# Altium PCB PCB1.PcbDoc
Units mil, origin at the board's own origin, x right, y up, seen from the top; angles counter-clockwise.
Board outline 1480 x 1240 mil, 4 copper layers (Top Copper, GND Layer, PWR Layer, Bottom Copper), stack 46.063 mil thick; 32 components, 16 nets, 86 pads, 50 vias.
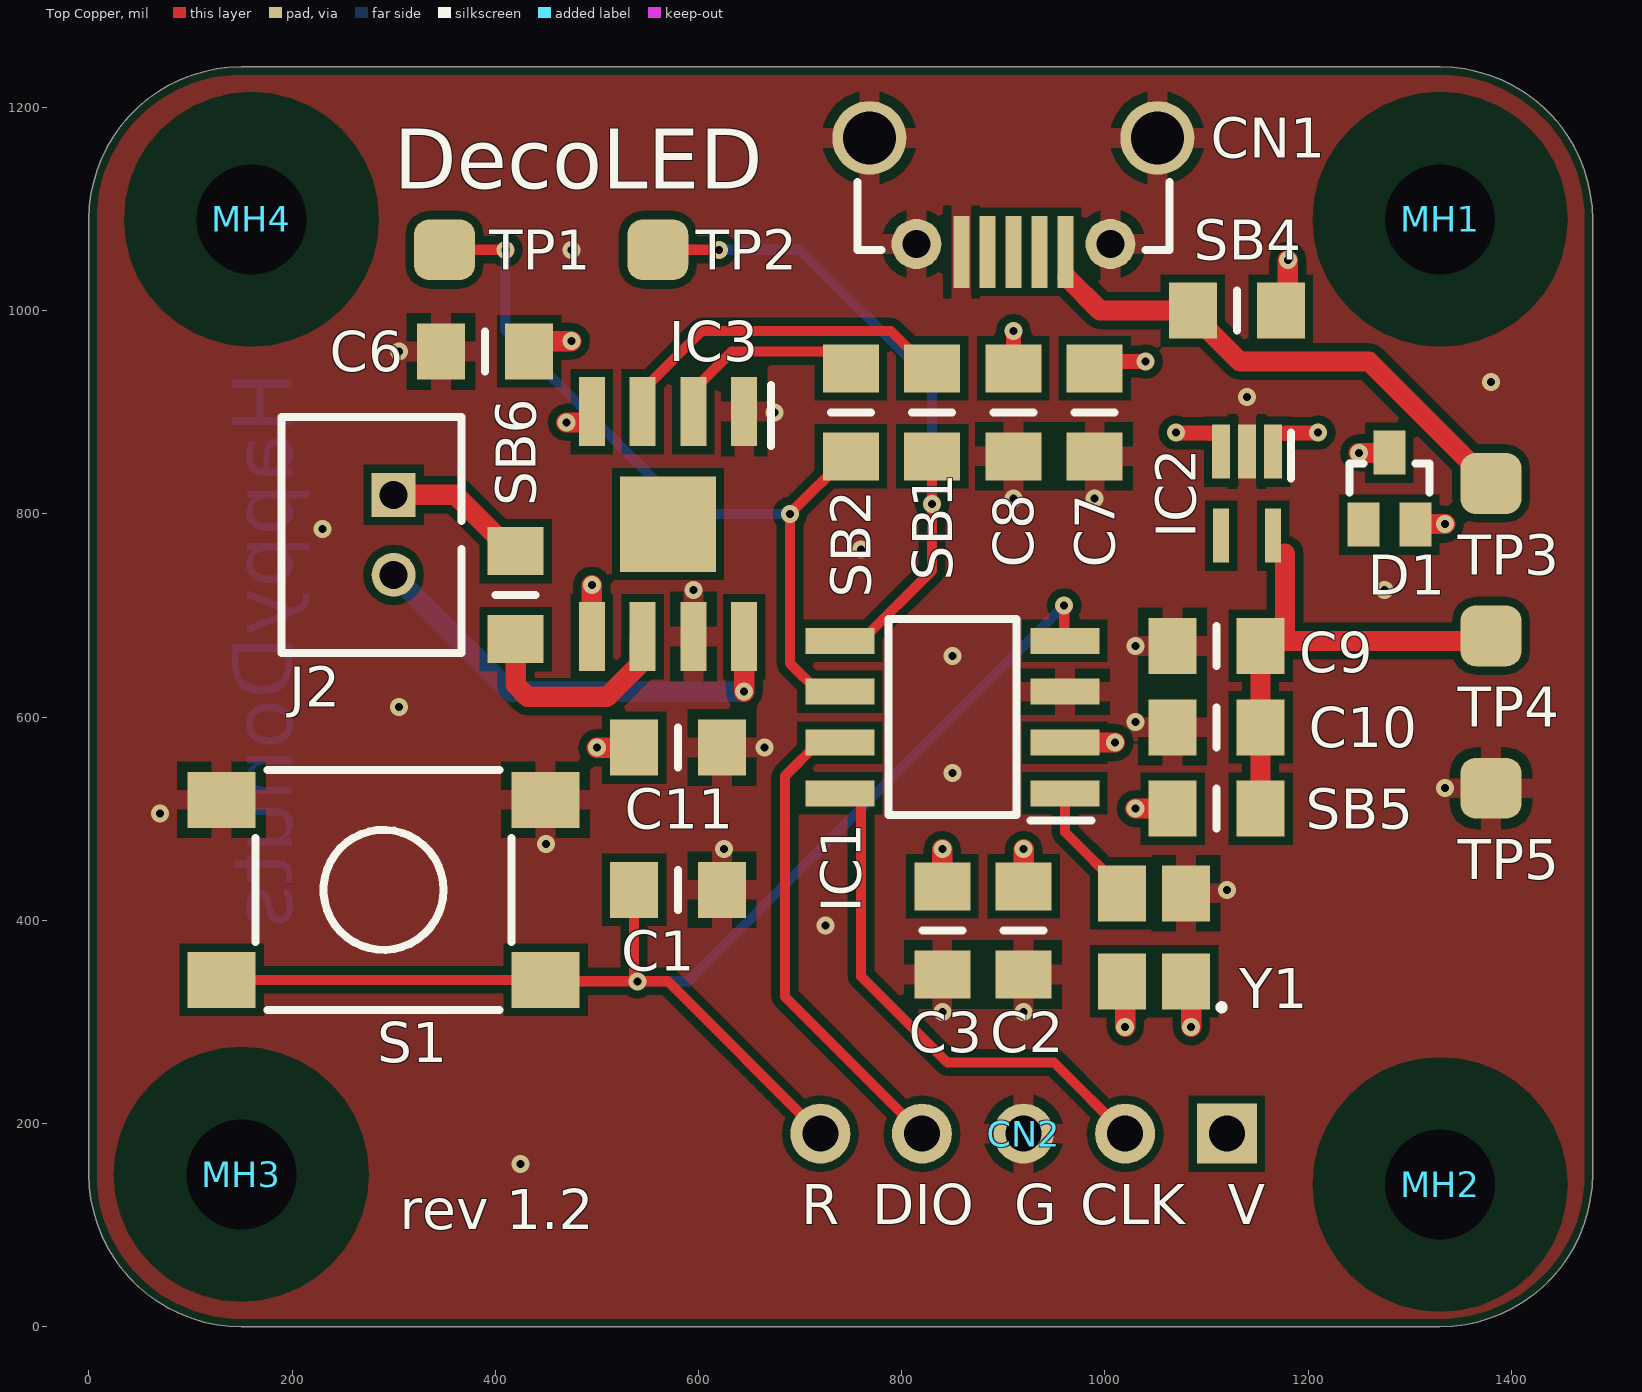
[diagram p0: Top Copper view]
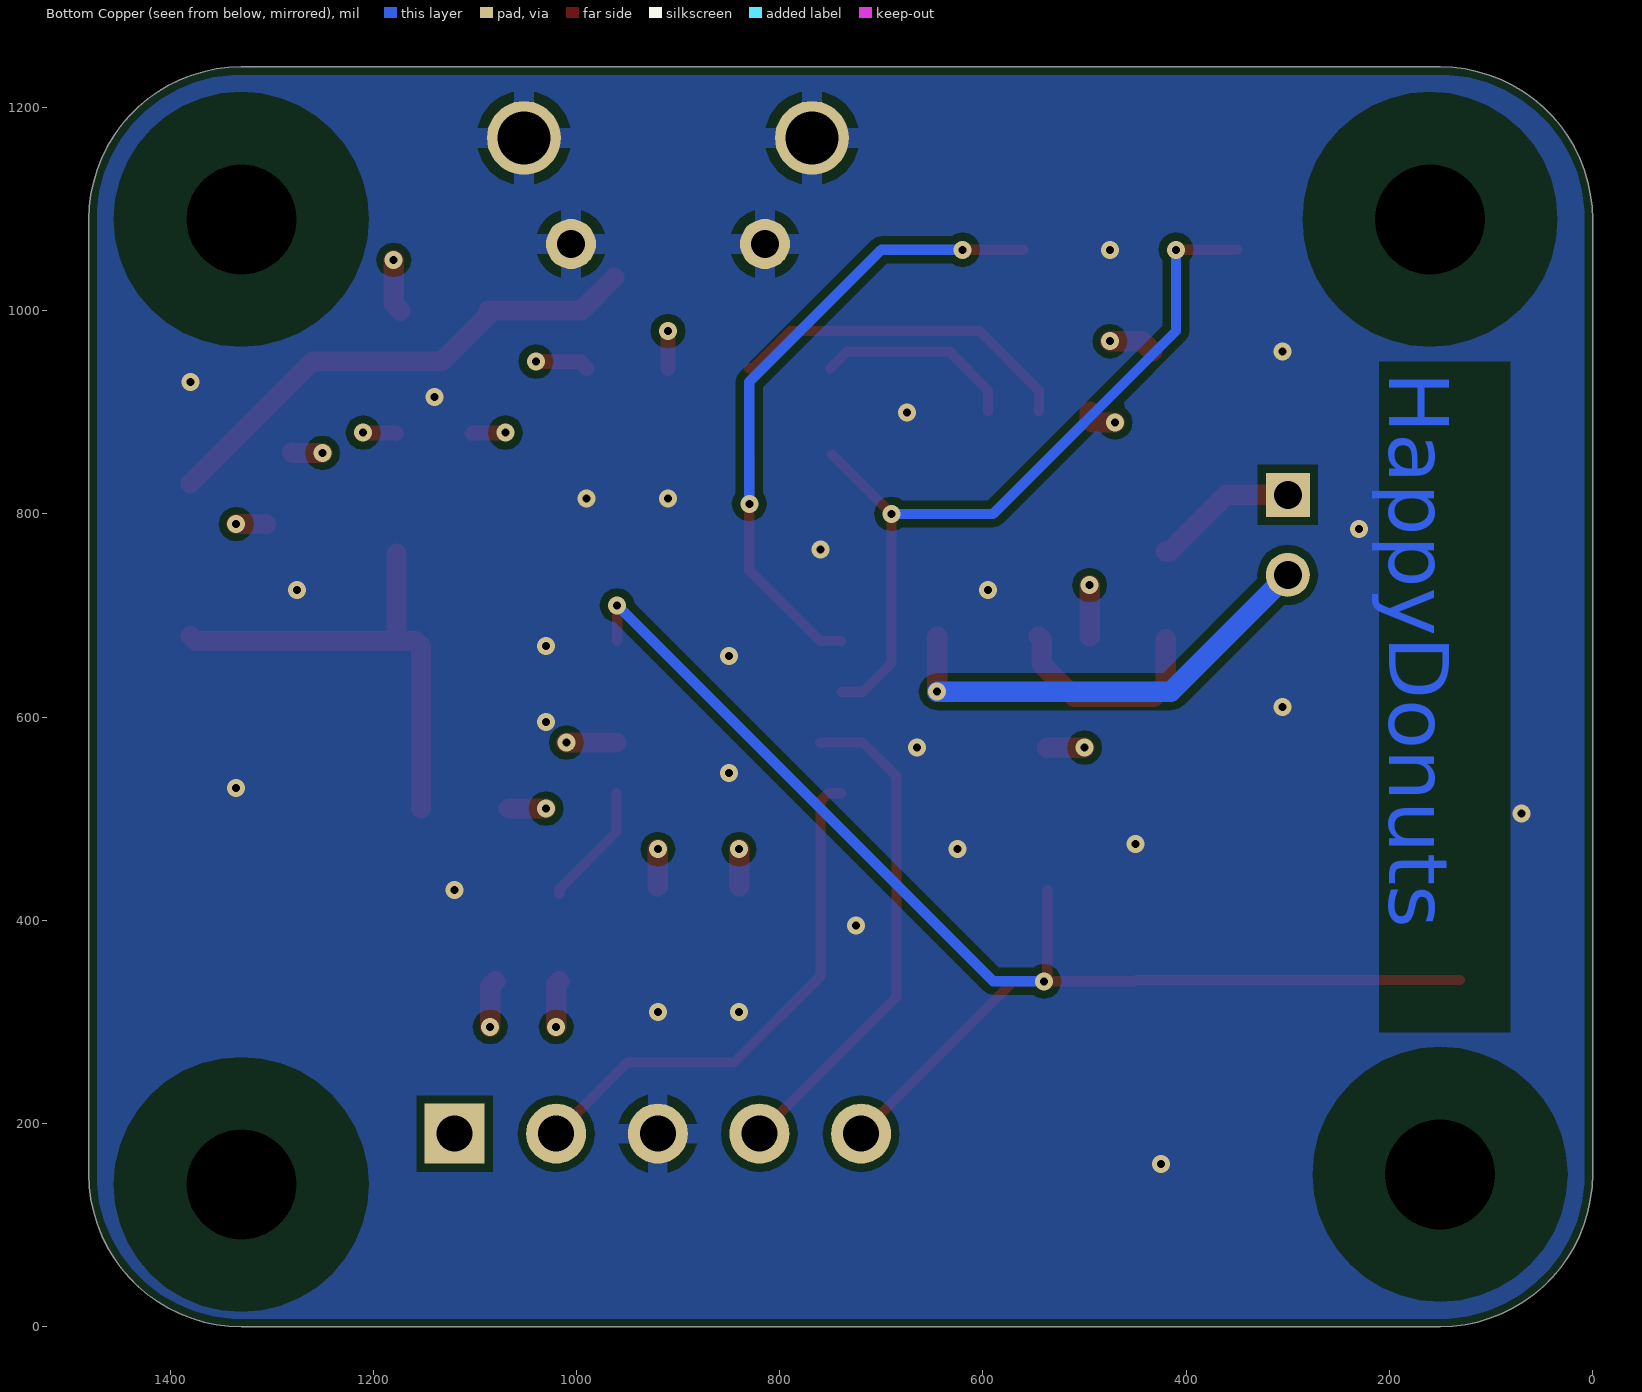
[diagram p1: Bottom Copper view, seen from below]
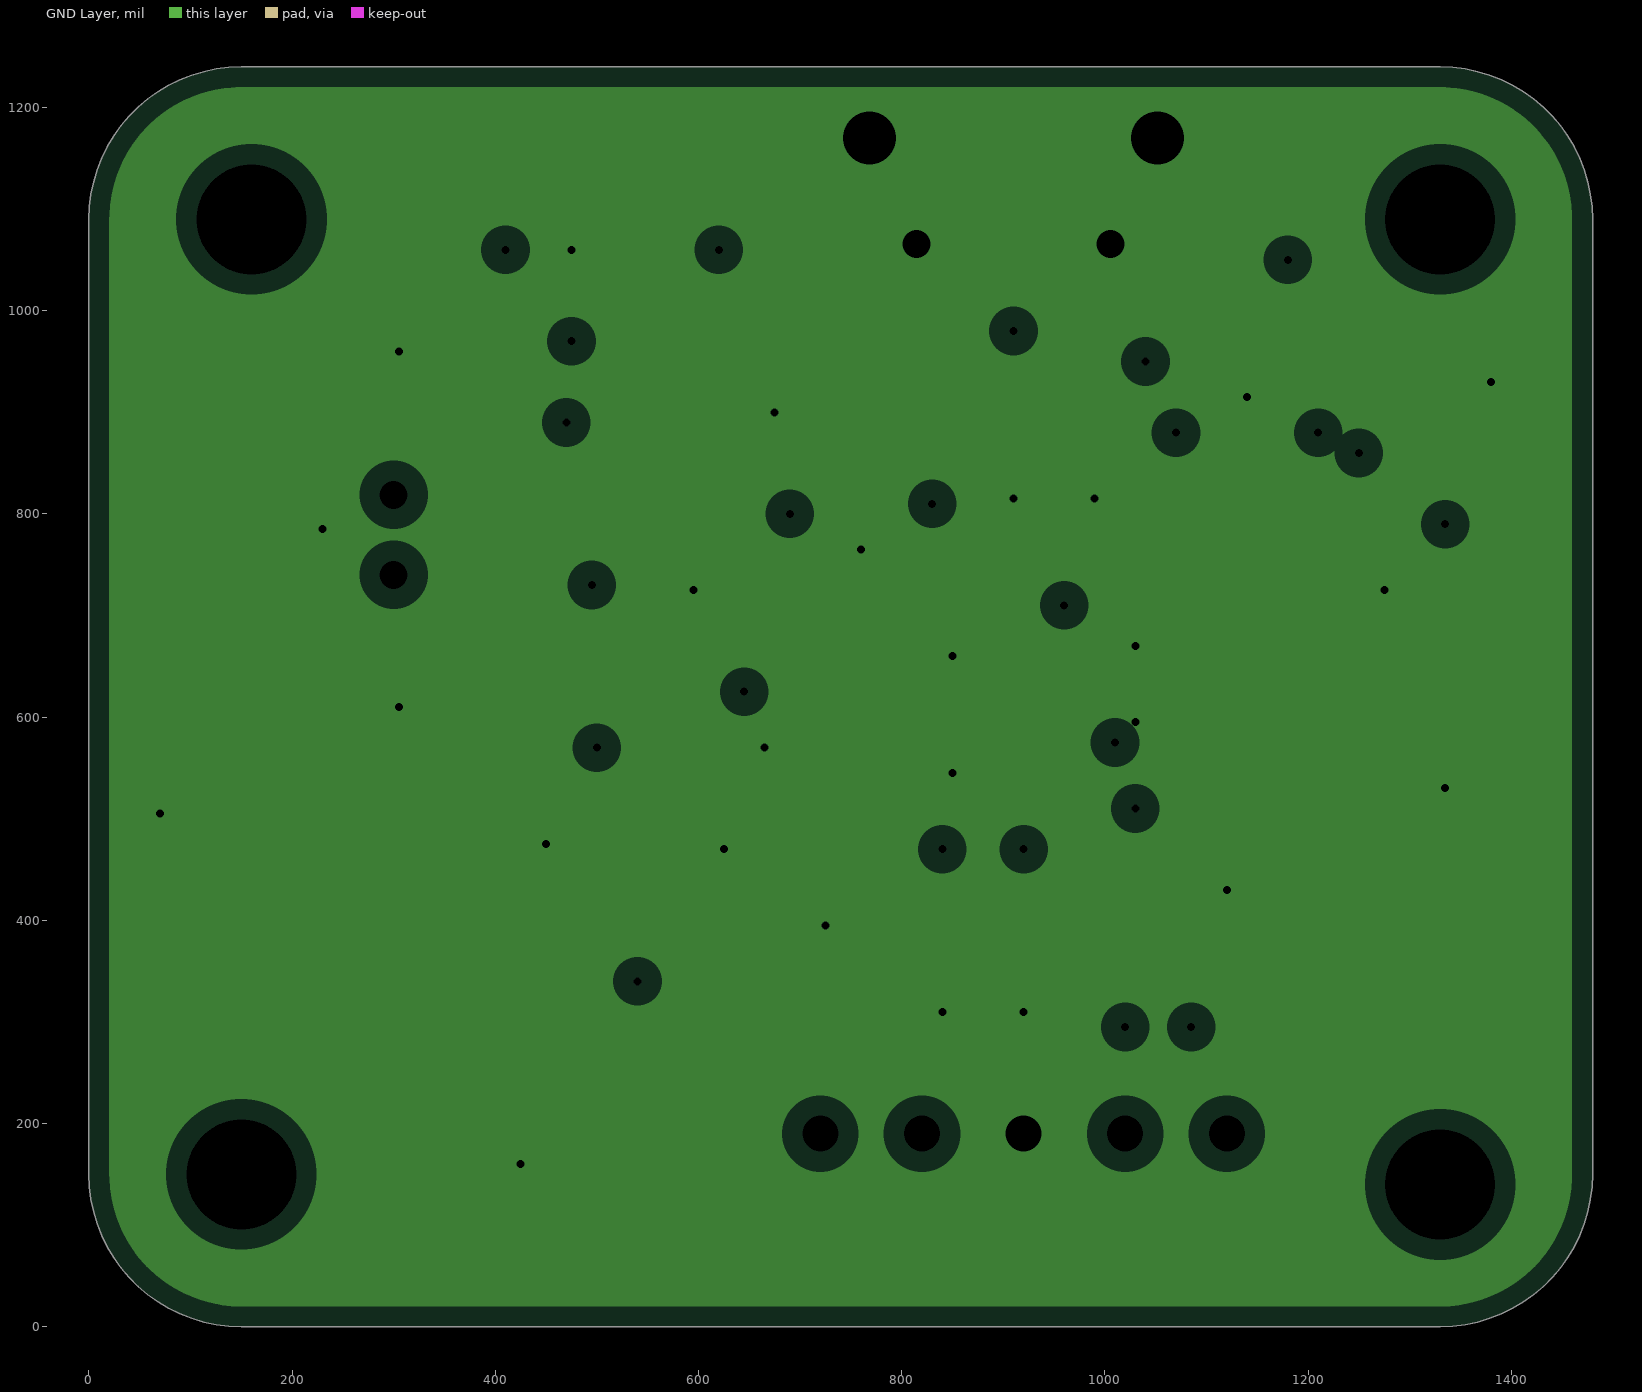
[diagram p2: GND Layer, clearances drawn from the general rule]
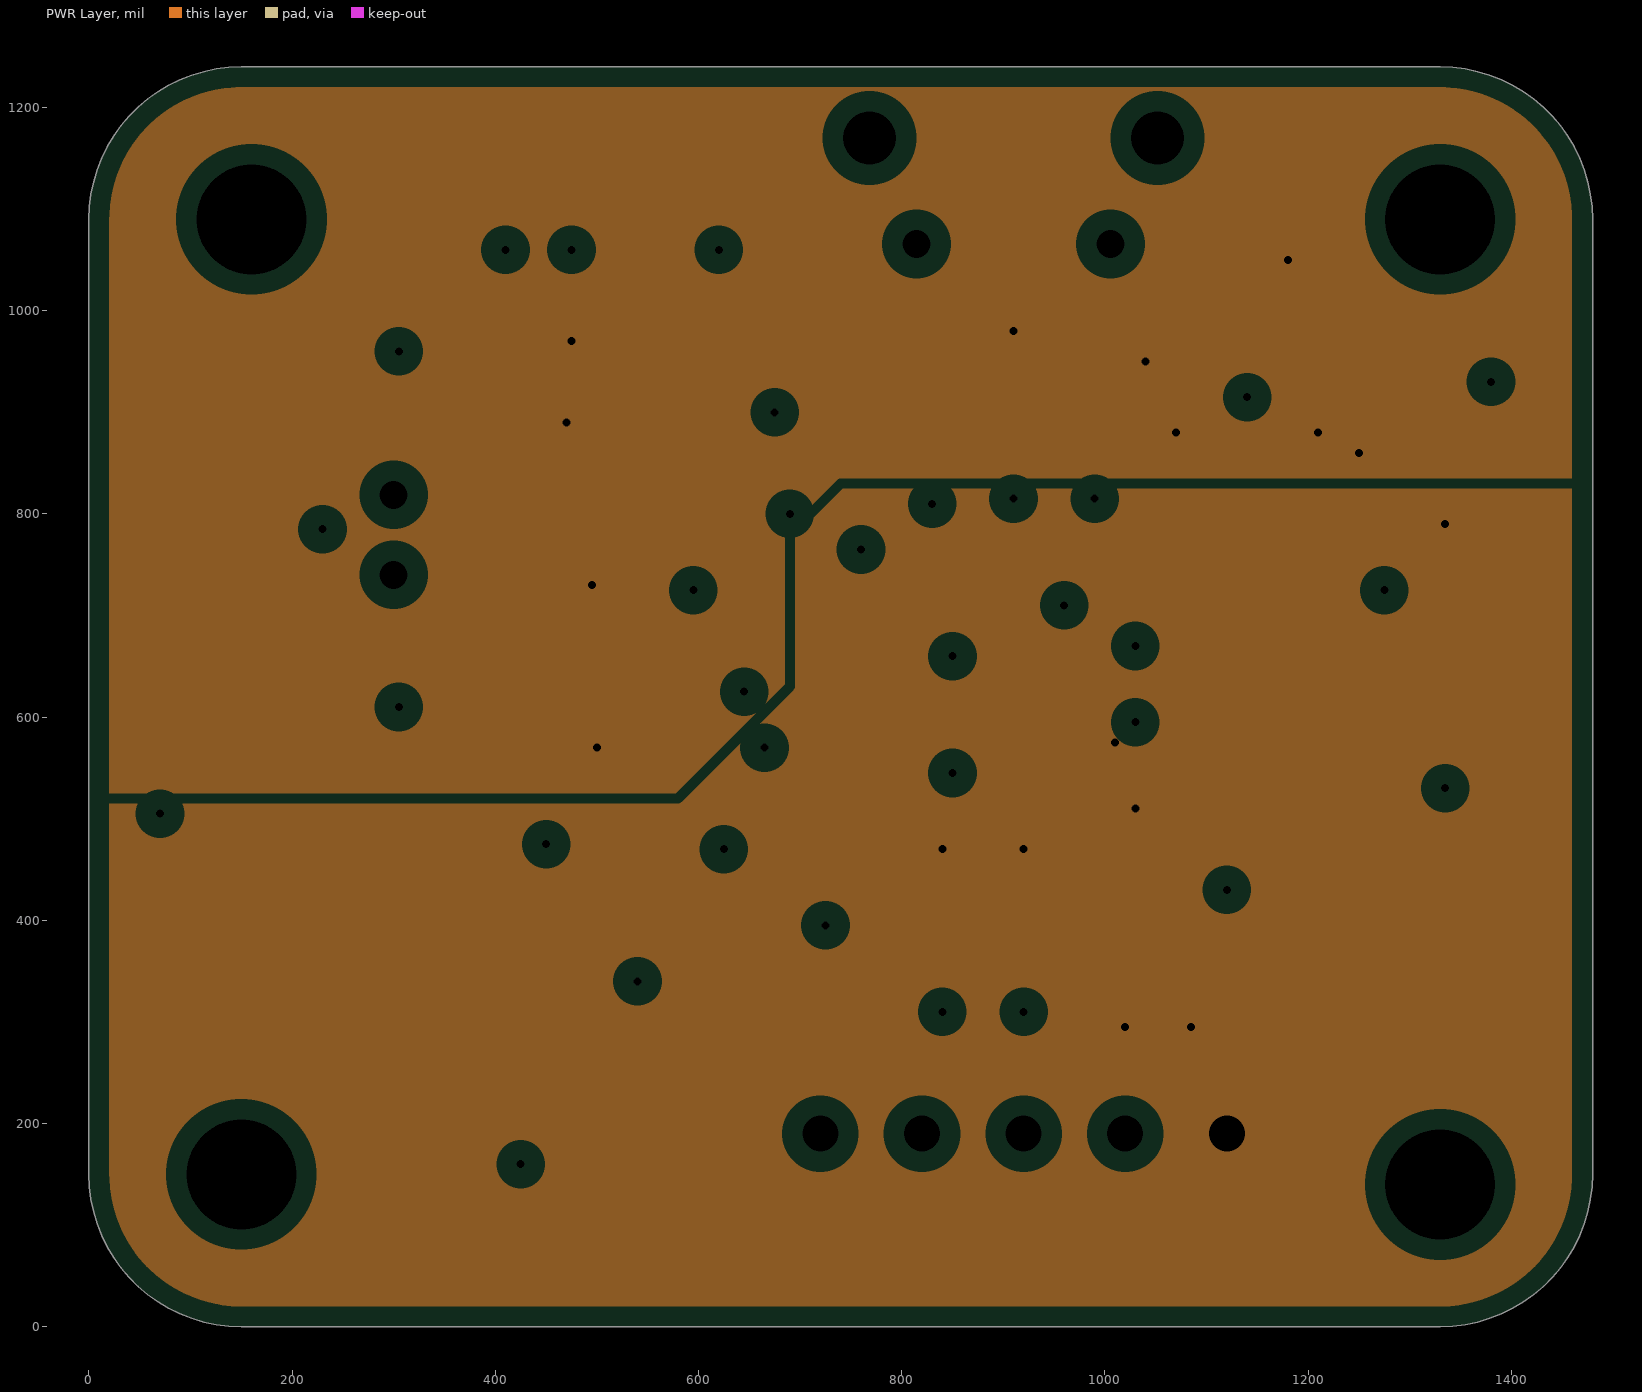
[diagram p3: PWR Layer, clearances drawn from the general rule]
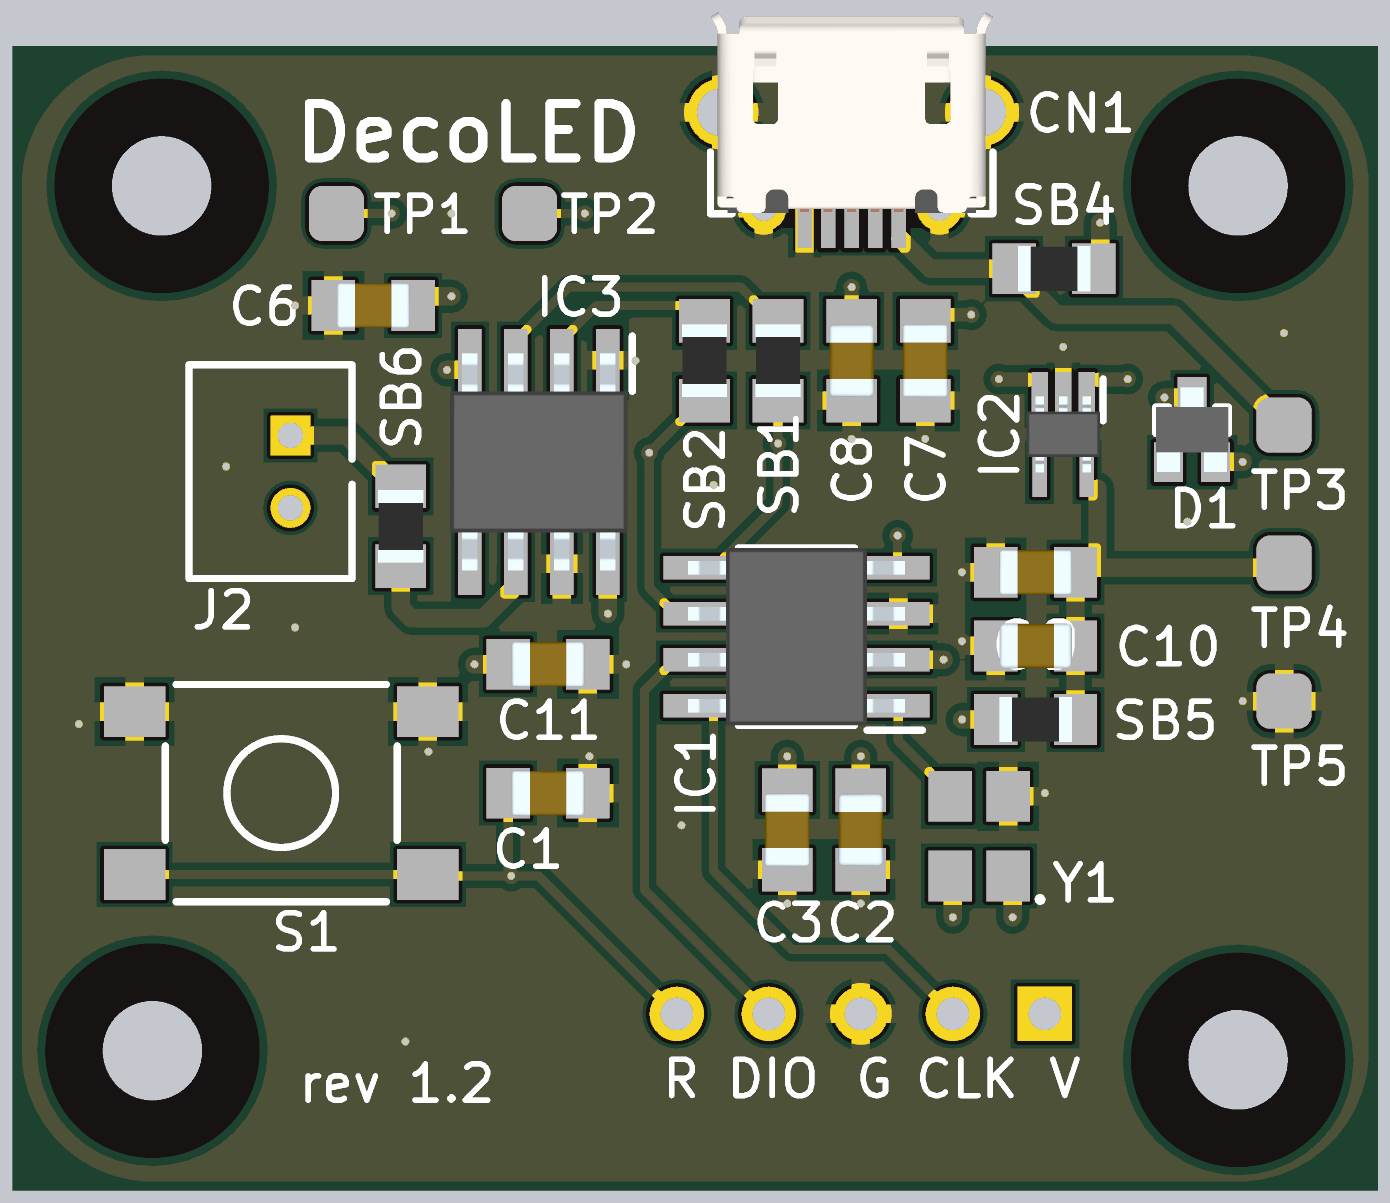
[diagram p4: 3D render of the assembled board from above, using the file's embedded part models]

## Layer stack, top to bottom
Top Mask: solder mask 0.5906, Solder Resist, Dk 3.8
Top Copper: signal copper 1.378
Dielectric 1: prepreg 7.874, 7628, Dk 4.6
GND Layer: plane copper 0.689, net GND
Core: core 26.1811, FR-4, Dk 4.5
PWR Layer: plane copper 0.689, net (Multiple Nets)
Dielectric 2: prepreg 7.874, 7628, Dk 4.6
Bottom Copper: signal copper 1.378
Bottom Mask: solder mask 0.5906, Solder Resist, Dk 3.8

## Board outline
150,0 cw(c150,150) 0,150 0,1090 cw(c150,1090) 150,1240 1330,1240 cw(c1330,1090) 1480,1090 1480,150 cw(c1330,150) 1330,0

## Design rules (kind name [scope] priority, off if disabled: settings)
BoardOutlineClearance [All] p1: gap=7.87 ignorepadtopadclearanceinfootprint=FALSE except(15.75: Arc-SplitBarrior Arc-SplitContinuation Track-SplitBarrior Track-SplitContinuation SMDPad-SplitBarrior SMDPad-SplitContinuation THPad-SplitBarrior THPad-SplitContinuation Via-SplitBarrior Via-SplitContinuation Fill-SplitBarrior Fill-SplitContinuation Poly-SplitBarrior Poly-SplitContinuation Region-SplitBarrior Region-SplitContinuation Text-SplitBarrior Text-SplitContinuation)
Clearance "Mounting Holes" [HasFootprint('MOUNTING_HOLE_NP')] p1: gap=7.87 ignorepadtopadclearanceinfootprint=FALSE except(3.5: Arc-Arc Arc-Track Arc-SMDPad Track-Track Track-SMDPad SMDPad-SMDPad; 5: Arc-Via Track-Via SMDPad-Via THPad-Via Via-Via; 10: Arc-Text Track-Text SMDPad-Text THPad-Text Via-Text Fill-Text Poly-Text Region-Text Text-Text; 70.87: Fill-Hole Poly-Hole Region-Hole)
Clearance "Clearance Bottom Layer" [OnLayer('Bottom Layer')] p2: gap=8 ignorepadtopadclearanceinfootprint=TRUE except(10: Arc-Text Track-Text SMDPad-Text THPad-Text Via-Text Fill-Text Poly-Text Region-Text Text-Text)
Clearance "Clearance Top Layer" [OnLayer('Top Layer')] p3: gap=8 ignorepadtopadclearanceinfootprint=TRUE except(10: Arc-Text Track-Text SMDPad-Text THPad-Text Via-Text Fill-Text Poly-Text Region-Text Text-Text)
Clearance [All] p4: gap=7.87 ignorepadtopadclearanceinfootprint=FALSE except(3.5: Arc-Arc Arc-Track Arc-SMDPad Track-Track Track-SMDPad SMDPad-SMDPad; 5: Arc-Via Track-Via SMDPad-Via THPad-Via Via-Via; 10: Arc-Text Track-Text SMDPad-Text THPad-Text Via-Text Fill-Text Poly-Text Region-Text Text-Text)
HoleSize [All] p1: absolutevalues=TRUE maxlimit=248.03 minlimit=7.87 maxpercent=80.000 minpercent=20.000
MinimumAnnularRing [All] p1: minimumring=3
MinimumSolderMaskSliver [All] p1: minsoldermaskwidth=3.94
PlaneClearance [All] p1: clearance=20
PlaneConnect [All] p1: pad.planeconnectstyle=Relief pad.reliefexpansion=20 pad.reliefentries=4 pad.reliefconductorwidth=10 pad.reliefairgap=10 via.planeconnectstyle=Direct via.reliefexpansion=20 via.reliefentries=4 via.reliefconductorwidth=10 via.reliefairgap=10
PolygonConnect PolygonConnect_1 [All] p1: thpad.connectstyle=Relief thpad.reliefconductorwidth=20 thpad.reliefentries=4 thpad.polygonreliefangle="90 Angle" thpad.airgapwidth=10 smdpad.connectstyle=Relief smdpad.reliefconductorwidth=20 smdpad.reliefentries=4 smdpad.polygonreliefangle="90 Angle" smdpad.airgapwidth=10 via.connectstyle=Direct via.reliefconductorwidth=20 via.reliefentries=4 via.polygonreliefangle="90 Angle" via.airgapwidth=10
RoutingCorners [All] p1: cornerstyle=Round minsetback=100 maxsetback=100
RoutingVias [All] p1: holewidth=19.68 width=39.37 viastyle="Through Hole" minholewidth=7.87 minwidth=17.72 maxholewidth=39.37 maxwidth=78.74
SilkToSilkClearance [All] p1: silktosilkclearance=3.94
SilkToSolderMaskClearance [IsPad] p1: minsilkscreentomaskgap=3.94 clearancetoexposedcopper=TRUE
SolderMaskExpansion [All] p1: expansion=4 istentingtop=FALSE
Width [All] p1: maxlimit=100 minlimit=3.5 preferedwidth=15
23 further rules are at their usual default settings.

## Components (designator, comment, footprint, x,y, rotation, side; value= is the part's Value field where it differs from the comment)
C1 "C0805C104K5RAC7411" CAPC2012X94N 580,430 r180 top value=100nF
C2 "CL21A475KPFNNNE" CAPC2012X135N 920,390 r90 top value=4.7uF
C3 "C0805C104K5RAC7411" CAPC2012X94N 840,390 r90 top value=100nF
C6 "C0805C104K5RAC7411" CAPC2012X94N 390,960 r0 top value=100nF
C7 "C0805C104K5RAC7411" CAPC2012X94N 990,900 r90 top value=100nF
C8 "885012107015" CAPC2012X135N 910,900 r90 top value=1uF
C9 "885012107015" CAPC2012X135N 1110,590 r0 top value=1uF
C10 "C0805C104K5RAC7411" CAPC2012X94N 1110,670 r0 top value=100nF
C11 "C0805C104K5RAC7411" CAPC2012X94N 580,570 r180 top value=100nF
CN1 "920-E52A2021S10100" USB307530A 910,1170 r180 top
CN2 "CN_5PIN" CN_5PIN 1120,190 r180 top
D1 "RB715UMTL" DAN217UMTL 1280,825 r0 top
IC1 "STM32G031J6M6" SOIC127P600X175-8N 850,600 r180 top
IC2 "MIC5366-3.3YC5-TR" SOT65P210X110-5N 1140,820 r270 top value=3.3V/150mA
IC3 "TB67H450FNG,EL" SOIC127P600X175-9N 570,790 r270 top
J2 "B2B-PH-K-S_LF__SN_" SHDR2W50P0X200_1X2_590X450X600P 300,818.74 r90 top
MH1 "MOUNTING_HOLE_NP" MOUNTING_HOLE_NP 1330,1090 r0 top
MH2 "MOUNTING_HOLE_NP" MOUNTING_HOLE_NP 1330,140 r0 top
MH3 "MOUNTING_HOLE_NP" MOUNTING_HOLE_NP 150,150 r0 top
MH4 "MOUNTING_HOLE_NP" MOUNTING_HOLE_NP 160,1090 r0 top
S1 "PTS815_SJM_250_SMTR_LFS" EVP-BT3G4A000 290,430 r0 top
SB1 "RC0805FR-070RL" RESC2012X60N 830,900 r270 top
SB2 "RC0805FR-070RL" RESC2012X60N 750,900 r270 top
SB4 "RC0805FR-070RL" RESC2012X60N 1130,1000 r0 top
SB5 "RC0805FR-070RL" RESC2012X60N 1110,510 r180 top
SB6 "RC0805FR-070RL" RESC2012X60N 420,720 r90 top
TP1 "TEST_POINT" TEST_POINT 350,1060 r0 top
TP2 "TEST_POINT" TEST_POINT 560,1060 r90 top
TP3 "TEST_POINT" TEST_POINT 1380,830 r0 top
TP4 "TEST_POINT" TEST_POINT 1380,680 r0 top
TP5 "TEST_POINT" TEST_POINT 1380,530 r0 top
Y1 "ASEKDV-32.768kHz-LC-T" ASEKDV-32.768kHz-LC-T 1048.5,383.31 r90 top value=32.768kHz

## Footprints (in the part's own frame and the unit in brackets; to place one, negate y for a bottom-side part, rotate by r counter-clockwise, add the part's x,y. Pads: shape width x height; smd on the part's side, far side on the other; paste and mask are expansions set on the pad)
ASEKDV-32.768kHz-LC-T [mm]
  rect 1.4x1.2 smd: 1(-1.1,-0.8) 2(1.1,-0.8) 3(1.1,0.8) 4(-1.1,0.8)
  silkscreen extent -1.8,-1.73 -1.7,-1.64, body extent -1.6,-1.25 1.6,1.25, height 1.2
CAPC2012X94N [mm]
  rect 1.2x1.4 smd: 1(-1.1,0) 2(1.1,0)
  silkscreen extent 0,-0.5 0,0.5, body extent -1,-0.63 1,0.63, height 0.94
CAPC2012X135N [mm]
  rect 1.2x1.4 smd: 1(-1.1,0) 2(1.1,0)
  silkscreen extent 0,-0.5 0,0.5, body extent -1,-0.63 1,0.63, height 1.35
CN_5PIN [mm] "Connector; Edge; 22 Position"
  rect 1.5x1.5 hole 0.9: 1(0,0)
  round 1.5 hole 0.9: 2(2.54,0) 3(5.08,0) 4(7.62,0) 5(10.16,0)
  body extent -1.17,-1.25 11.53,1.25, height 8.2
DAN217UMTL [mm]
  rect 0.8x1.1 smd: 1(-0.65,-0.9) 2(0.65,-0.9) 3(0,0.9)
  silkscreen extent -1,-0.1 1,0.63, body extent -1,-1.17 1,1.17, height 1.1
EVP-BT3G4A000 [mm]
  rect 1.7x1.4 smd: 1(-4.05,2.25) 2(4.05,2.25) 3(4.05,-2.25) 4(-4.05,-2.25)
  silkscreen extent -3.2,-3 3.2,3, body extent -3.2,-3 3.2,3, height 4.3
MOUNTING_HOLE_NP [mil]
  round 60 hole 108.27 unplated mask+86.61: 5(0,0)
RESC2012X60N [mm]
  rect 1.2x1.4 smd: 1(-1.1,0) 2(1.1,0)
  silkscreen extent 0,-0.5 0,0.5, body extent -1,-0.63 1,0.63, height 0.6
SHDR2W50P0X200_1X2_590X450X600P [mm]
  rect 1.1x1.1 hole 0.7: 1(0,0)
  round 1.1 hole 0.7: 2(-2,0)
  silkscreen extent -3.95,-1.7 1.95,2.8, body extent -3.95,-1.7 1.95,2.8, height 6
SOIC127P600X175-8N [mm]
  rect 1.725x0.65 smd: 1(-2.812,1.905) 2(-2.812,0.635) 3(-2.812,-0.635) 4(-2.812,-1.905) 5(2.812,-1.905) 6(2.812,-0.635) 7(2.812,0.635) 8(2.812,1.905)
  silkscreen extent -3.47,-2.45 1.6,2.58, body extent -3,-2.45 3,2.45, height 1.75
SOIC127P600X175-9N [mm]
  rect 1.725x0.65 smd: 1(-2.812,1.905) 2(-2.812,0.635) 3(-2.812,-0.635) 4(-2.812,-1.905) 5(2.812,-1.905) 6(2.812,-0.635) 7(2.812,0.635) 8(2.812,1.905)
  rect 2.39x2.39 smd: 9(0,0)
  silkscreen extent -3.47,2.58 -1.95,2.58, body extent -3,-2.45 3,2.45, height 1.75
SOT65P210X110-5N [mm]
  rect 1.35x0.45 smd: 1(-1.05,0.65) 2(-1.05,0) 3(-1.05,-0.65)
  rect 1.35x0.4 smd: 4(1.05,-0.65) 5(1.05,0.65)
  silkscreen extent -1.53,1.1 -0.38,1.1, body extent -1.05,-1.01 1.05,1.01, height 1.1
TEST_POINT [mil] "Test point"
  rrect50% 60x60 smd: TP(0,0)
USB307530A [mm]
  rect 0.4x1.8 smd mask+0.125: 1(-1.3,2.85) 2(-0.65,2.85) 3(0,2.85) 4(0.65,2.85) 5(1.3,2.85)
  round 1.25 hole 0.7 mask+0.102: 6(2.425,2.65)
  round 1.85 hole 1.328: 7(3.6,0) 8(-3.6,0)
  round 1.25 hole 0.7: 9(-2.425,2.65)
  silkscreen extent -3.9,1.1 3.9,2.8, body extent -3.9,-2.77 3.9,2.77, height 2.49

## Part data
C1 C3 C6 C7 C10 C11: "Capacitor", Manufacturer_Name=Kemet, Mouser Part Number=80-C0805C104K5RACLR, Arrow Part Number=C0805C104K5RAC7411, Arrow Price/Stock=https://www.arrow.com/en/products/c0805c104k5rac7411/kemet-corporation, Datasheet Link=https://www.mouser.com/datasheet/2/212/KEM_C1002_X7R_SMD-1102033.pdf, Height=0.88mm, Manufacturer_Part_Number=C0805C104K5RAC7411, Mouser Price/Stock=https://www.mouser.co.uk/ProductDetail/KEMET/C0805C104K5RAC7411?qs=jbRM9o5BbzPcVXF0wW9AYg%3D%3D
C2: "Capacitor", Manufacturer_Name="Wurth Elektronik", Mouser Part Number=187-CL21A475KPFNNNE, Datasheet Link=https://www.mouser.fr/datasheet/2/585/MLCC-1837944.pdf, Height=1.35mm, Manufacturer_Part_Number=CL21A475KPFNNNE, Mouser Price/Stock=https://www.mouser.co.uk/ProductDetail/Wurth-Elektronik/885012107015?qs=0KOYDY2FL2%252BNQREZP%252BtVoQ%3D%3D
C8 C9: "Capacitor", Manufacturer_Name="Wurth Elektronik", Mouser Part Number=710-885012107015, Datasheet Link=https://katalog.we-online.com/pbs/datasheet/885012107015.pdf, Height=1.35mm, Manufacturer_Part_Number=885012107015, Mouser Price/Stock=https://www.mouser.co.uk/ProductDetail/Wurth-Elektronik/885012107015?qs=0KOYDY2FL2%252BNQREZP%252BtVoQ%3D%3D
CN1: "USB connector", Arrow Part Number=TB67H450FNG,EL, Manufacturer_Name="Jing Extension of the Electronic Co.", Arrow Price/Stock=https://www.arrow.com/en/products/tb67h450fngel/toshiba?region=nac, Datasheet Link=http://toshiba.semicon-storage.com/info/docget.jsp?did=65346&prodName=TB67H450FNG, Height=1.9mm, Manufacturer_Part_Number=https://datasheet.lcsc.com/lcsc/2103051832_Jing-Extension-of-the-Electronic-Co--920-E52A2021S10100_C10418.pdf, Mouser Part Number=920-E52A2021S10100, Mouser Price/Stock=https://www.mouser.co.uk/ProductDetail/Toshiba/TB67H450FNGEL?qs=h6V4JsTaLXeReNg2bp0jug%3D%3D
CN2: "Connector"
D1: "Schottky Diode", Manufacturer_Name="ROHM Semiconductor", Mouser Part Number=755-RB715UMTL, Datasheet Link=http://uk.rs-online.com/web/p/products/1835297, Height=1mm, Manufacturer_Part_Number=RB715UMTL, Mouser Price/Stock=https://www.mouser.co.uk/ProductDetail/ROHM-Semiconductor/RB715UMTL?qs=HXFqYaX1Q2wTXMfu8QxCQg%3D%3D
IC1: "Integrated Circuit", Manufacturer_Name=STMicroelectronics, Mouser Part Number=511-STM32G031J6M6, Datasheet Link=https://www.mouser.fr/datasheet/2/389/dm00613879-1799607.pdf, Height=1.75mm, Manufacturer_Part_Number=STM32G031J6M6
IC2: "LDO", Arrow Part Number=MIC5365-3.3YC5-TR, Manufacturer_Name=Microchip, Mouser Part Number=998-MIC5366-3.3YC5TR, Arrow Price/Stock=https://www.arrow.com/en/products/mic5365-3.3yc5-tr/microchip-technology?region=nac, Datasheet Link=https://www.mouser.fr/datasheet/2/268/MIC5365_6_High_Performance_Single_150mA_LDO_DS2000-2826882.pdf, Height=1.1mm, Manufacturer_Part_Number=MIC5366-3.3YC5-TR, Mouser Price/Stock=https://www.mouser.co.uk/ProductDetail/Microchip-Technology-Micrel/MIC5365-33YC5-TR?qs=U6T8BxXiZAXvJj%252BPZ%252B301w%3D%3D
IC3: "Integrated Circuit", Manufacturer_Name=Toshiba, Mouser Part Number=757-TB67H450FNGEL, Arrow Part Number=TB67H450FNG,EL, Arrow Price/Stock=https://www.arrow.com/en/products/tb67h450fngel/toshiba?region=nac, Datasheet Link=http://toshiba.semicon-storage.com/info/docget.jsp?did=65346&prodName=TB67H450FNG, Height=1.75mm, Manufacturer_Part_Number=TB67H450FNG,EL, Mouser Price/Stock=https://www.mouser.co.uk/ProductDetail/Toshiba/TB67H450FNGEL?qs=h6V4JsTaLXeReNg2bp0jug%3D%3D
J2: "Connector", Arrow Part Number=B2B-PH-K-S(LF)(SN), Manufacturer_Name="JST (JAPAN SOLDERLESS TERMINALS)", Arrow Price/Stock=https://www.arrow.com/en/products/b2b-ph-k-s-lf-sn/jst-manufacturing, Datasheet Link=https://datasheet.lcsc.com/szlcsc/JST-Sales-America-B2B-PH-K-S-LF-SN_C131337.pdf, Height=6mm, Manufacturer_Part_Number=B2B-PH-K-S(LF)(SN)
MH1 MH2 MH3 MH4: "Mounting hole"
S1: "Switch", Arrow Part Number="PTS815 SJM 250 SMTR LFS", Manufacturer_Name="C & K COMPONENTS", Mouser Part Number=611-PTS815SJM250SMTR, Arrow Price/Stock=https://www.arrow.com/en/products/pts815-sjm-250-smtr-lfs/ck, Datasheet Link="https://componentsearchengine.com/Datasheets/1/PTS815 SJM 250 SMTR LFS.pdf", Height=2.7mm, Manufacturer_Part_Number="PTS815 SJM 250 SMTR LFS", Mouser Price/Stock=https://www.mouser.co.uk/ProductDetail/CK/PTS815-SJM-250-SMTR-LFS?qs=ahcBuItHZ3xKWmfV%2F2E6bA%3D%3D
SB1 SB2 SB4 SB5 SB6: "Jumper (0 ohm)", Manufacturer_Name="YAGEO (PHYCOMP)", Mouser Part Number=603-RC0805FR-070RL, Datasheet Link=https://datasheet.datasheetarchive.com/originals/distributors/Datasheets_SAMA/902f9e387b938f871d31120f5fc1d65e.pdf, Height=0.6mm, Manufacturer_Part_Number=RC0805FR-070RL, Mouser Price/Stock=https://www.mouser.co.uk/ProductDetail/YAGEO/RC0805FR-070RL?qs=fRxXYNj8ftF6kXqh1XbZJQ%3D%3D
TP1 TP2 TP3 TP4 TP5: "Test point"
Y1: "Crystal or Oscillator", Manufacturer_Name=ABRACON, Mouser Part Number=815-ASEKDV32768KHLCT, Datasheet Link=https://www.mouser.fr/datasheet/2/3/ABRC_S_A0012625913_1-2519507.pdf, Height=1.2mm, Manufacturer_Part_Number=ASEKDV-32.768kHz-LC-T

## Via types
v1: diameter 17.72, hole 7.87, Top Copper to Bottom Copper, tented both sides, 50 vias

## Nets (pads, with @x,y where several pads share a name; then routed paths per layer and width w, separated by ;. In a path a pad name is that pad's centre, name@x,y a point inside that pad or via, vN(x,y) a via of type N, cw(c..) or ccw(c..) an arc to the next point about the centre after c; other vN are vias at no path point)
5V: C6.2 C7.2 C8.2 C11.2 D1.3 IC2.1 IC2.3 IC3.4 IC3.5 SB4.2 | length 405.7
  Top Copper w15: C8.2 v1(910,980) ; C7.2 996.69,950 v1(1040,950) ; v1(1070,880) 1070.47,879.53 1102.13,879.53 1102.6,879.06 ; 1177.4,879.06 1177.87,879.53 1209.53,879.53 v1(1210,880)
  Top Copper w20: C6.2 443.31,970 v1(475,970) ; v1(470,890) 492.2,890 495,892.8 IC3.4 ; IC3.5 v1(495,730) ; v1(500,570) C11.2 ; SB4.2 1180,1006.69 v1(1180,1050) ; v1(1250,860) 1279.57,860 D1.3
GND: C1.1 C2.1 C3.1 C6.1 C7.1 C8.1 C9.1 C10.1 C11.1 CN1.5 CN1.6 CN1.7 CN1.8 CN1.9 CN2.3 IC1.3 IC2.2 IC3.1 IC3.7 S1.1 S1.2 TP5.TP Y1.2 | length 0.9
  Top Copper w19.68: CN1.6 CN1.6@815.2,1065
  other v1: 425,160 840,310 920,310 725,395 1120,430 625,470 450,475 70,505 1335,530 850,545 665,570 1030,595 305,610 850,660 1030,670 595,725 1275,725 760,765 230,785 910,815 990,815 675,900 1140,915 1380,930 305,960 475,1060
NetC9_2: C9.2 C10.2 IC2.5 SB5.1 TP4.TP | length 477.9
  Top Copper w19.68: SB5.1 C9.2 C10.2 1158.31,675 1180,675 ; 1177.4,760.94 1177.4,677.6 1180,675 ; TP4.TP 1375,675 1180,675
NetCN1_1: CN1.1 SB4.1 TP3.TP | length 503.6
  Top Copper w19.68: CN1.1@962.68,1032.68 995.35,1000 SB4.1 1086.69,996.06 1132.76,950 1260,950 TP3.TP
NetIC1_1: IC1.1 Y1.3 | length 121.7
  Top Copper w10: IC1.1 960.71,486.85 1017.01,430.55 Y1.3
NetIC1_5: IC1.5 SB1.2 TP2.TP | length 675.5
  Top Copper w10: TP2.TP v1(620,1060) ; IC1.5 760.45,675 830,744.55 v1(830,810) SB1.2
  Bottom Copper w10: v1(620,1060) 700,1060 830,930 v1(830,810)
NetIC1_6: IC1.6 SB2.2 TP1.TP | length 784.9
  Top Copper w10: TP1.TP v1(410,1060) ; IC1.6 718.13,625 690,653.13 v1(690,800) SB2.2@748.35,858.35
  Bottom Copper w10: v1(410,1060) 410,980 590,800 v1(690,800)
NetIC3_6: IC3.6 SB6.1 | length 213.6
  Top Copper w20: SB6.1 420,631.72 431.72,620 510,620 542.2,652.2 542.2,676.5 IC3.6
NetIC3_8: IC3.8 J2.2 | length 446.9
  Top Copper w20: v1(645,625) IC3.8
  Bottom Copper w20: J2.2 415,625 v1(645,625)
NetJ2_1: J2.1 SB6.2 | length 143
  Top Copper w20: J2.1 360.63,818.74 416.06,763.31 SB6.2
NRST: C1.2 CN2.5 IC1.4 S1.3 S1.4 | length 1352.1
  Top Copper w10: S1.4 S1.3 450.87,340 v1(540,340) ; C1.2 536.69,345.4 540,342.09 v1(540,340) ; CN2.5 570,340 v1(540,340) ; v1(960,710) 960,675.71 IC1.4
  Bottom Copper w10: v1(540,340) 590,340 v1(960,710)
PWM_A: IC3.3 SB1.1 | length 345.4
  Top Copper w10: IC3.3 545,921.87 603.13,980 789.37,980 826.06,943.31 SB1.1
PWM_B: IC3.2 SB2.1 | length 198.9
  Top Copper w10: IC3.2 595,921.87 633.13,960 733.31,960 SB2.1
SWCLK: CN2.2 IC1.8 | length 520.3
  Top Copper w10: IC1.8 752.2,525 760,517.2 760,345 845,260 950,260 CN2.2
SWDIO: CN2.4 IC1.7 | length 497
  Top Copper w10: IC1.7@760.45,575 718.13,575 685,541.87 685,325 CN2.4
VDD: C2.2 C3.2 CN2.1 D1.2 IC1.2 SB5.2 Y1.1 Y1.4 | length 282.3
  Top Copper w20: C3.2 v1(840,470) ; C2.2 v1(920,470) ; IC1.2 v1(1010,575) ; Y1.4 1020,337.01 v1(1020,295) ; v1(1030,510) SB5.2 ; Y1.1 1085,335 v1(1085,295) ; D1.2 1306.02,790 v1(1335,790)
pads on no net: CN1.2 CN1.3 CN1.4 D1.1 IC2.4 IC3.9 MH1.5 MH2.5 MH3.5 MH4.5

## Polygon pours and split planes (outlines as drawn)
GND on Bottom Copper "Bottom Copper-GND" (solid, pour order 35): 150,0 cw(c150,150) 0,150 0,1090 cw(c150,1090) 150,1240 1330,1240 cw(c1330,1090) 1480,1090 1480,150 cw(c1330,150) 1330,0
GND on Top Copper "Top Copper-GND" (solid, pour order 34): 150,0 cw(c150,150) 0,150 0,1090 cw(c150,1090) 150,1240 1330,1240 cw(c1330,1090) 1480,1090 1480,150 cw(c1330,150) 1330,0
VDD on PWR Layer (split plane): 1459.9,150 1459.96,149.41 1459.65,140.73 1458.66,131.5 1457.01,122.37 1454.72,113.38 1451.79,104.58 1448.24,96 1444.08,87.71 1439.35,79.73 1434.06,72.1 1428.23,64.88 1421.91,58.09 1415.12,51.77 1407.9,45.94 1400.27,40.65 1392.29,35.92 1384,31.76 1375.42,28.21 1366.62,25.28 1357.63,22.99 1348.5,21.34 1339.27,20.35 1330.59,20.04 1330,20.1 150,20.1 149.41,20.04 140.73,20.35 131.5,21.34 122.37,22.99 113.38,25.28 104.58,28.21 96,31.76 87.71,35.92 79.73,40.65 72.1,45.94 64.88,51.77 58.09,58.09 51.77,64.88 45.94,72.1 40.65,79.73 35.92,87.71 31.76,96 28.21,104.58 25.28,113.38 22.99,122.37 21.34,131.5 20.35,140.73 20.04,149.41 20.1,150 20.1,514.9 580,514.9 581.95,515.29 583.6,516.4 693.6,626.4 694.71,628.05 695.1,630 695.1,777.89 742.11,824.9 1459.9,824.9
5V on PWR Layer (split plane): 1339.27,1219.65 1348.5,1218.66 1357.63,1217.01 1366.62,1214.72 1375.42,1211.79 1384,1208.24 1392.29,1204.08 1400.27,1199.35 1407.9,1194.06 1415.12,1188.23 1421.91,1181.91 1428.23,1175.12 1434.06,1167.9 1439.35,1160.27 1444.08,1152.29 1448.24,1144 1451.79,1135.42 1454.72,1126.62 1457.01,1117.63 1458.66,1108.5 1459.65,1099.27 1459.96,1090.59 1459.9,1090 1459.9,835.1 740,835.1 738.05,834.71 736.4,833.6 686.4,783.6 685.29,781.95 684.9,780 684.9,632.11 577.89,525.1 20.1,525.1 20.1,1090 20.04,1090.59 20.35,1099.27 21.34,1108.5 22.99,1117.63 25.28,1126.62 28.21,1135.42 31.76,1144 35.92,1152.29 40.65,1160.27 45.94,1167.9 51.77,1175.12 58.09,1181.91 64.88,1188.23 72.1,1194.06 79.73,1199.35 87.71,1204.08 96,1208.24 104.58,1211.79 113.38,1214.72 122.37,1217.01 131.5,1218.66 140.73,1219.65 149.41,1219.96 150,1219.9 1330,1219.9 1330.59,1219.96
GND on GND Layer (split plane): 1339.27,1219.65 1348.5,1218.66 1357.63,1217.01 1366.62,1214.72 1375.42,1211.79 1384,1208.24 1392.29,1204.08 1400.27,1199.35 1407.9,1194.06 1415.12,1188.23 1421.91,1181.91 1428.23,1175.12 1434.06,1167.9 1439.35,1160.27 1444.08,1152.29 1448.24,1144 1451.79,1135.42 1454.72,1126.62 1457.01,1117.63 1458.66,1108.5 1459.65,1099.27 1459.96,1090.59 1459.9,1090 1459.9,150 1459.96,149.41 1459.65,140.73 1458.66,131.5 1457.01,122.37 1454.72,113.38 1451.79,104.58 1448.24,96 1444.08,87.71 1439.35,79.73 1434.06,72.1 1428.23,64.88 1421.91,58.09 1415.12,51.77 1407.9,45.94 1400.27,40.65 1392.29,35.92 1384,31.76 1375.42,28.21 1366.62,25.28 1357.63,22.99 1348.5,21.34 1339.27,20.35 1330.59,20.04 1330,20.1 150,20.1 149.41,20.04 140.73,20.35 131.5,21.34 122.37,22.99 113.38,25.28 104.58,28.21 96,31.76 87.71,35.92 79.73,40.65 72.1,45.94 64.88,51.77 58.09,58.09 51.77,64.88 45.94,72.1 40.65,79.73 35.92,87.71 31.76,96 28.21,104.58 25.28,113.38 22.99,122.37 21.34,131.5 20.35,140.73 20.04,149.41 20.1,150 20.1,1090 20.04,1090.59 20.35,1099.27 21.34,1108.5 22.99,1117.63 25.28,1126.62 28.21,1135.42 31.76,1144 35.92,1152.29 40.65,1160.27 45.94,1167.9 51.77,1175.12 58.09,1181.91 64.88,1188.23 72.1,1194.06 79.73,1199.35 87.71,1204.08 96,1208.24 104.58,1211.79 113.38,1214.72 122.37,1217.01 131.5,1218.66 140.73,1219.65 149.41,1219.96 150,1219.9 1330,1219.9 1330.59,1219.96

## Other copper
Bottom Copper:
  text "HappyDonuts" at 200,939.94 h59.06 r90
PWR Layer (plane layer: these items are gaps in the copper):
  lines w10: 0,520 580,520 690,630 690,780 740,830 1110,830 1480,830

## Silkscreen, mask and mechanical layers (free items; w line width, h text height)
Top Overlay:
  text "DecoLED" at 299.96,1119.96 h59.06
  text "R" at 700.98,100.98 h39.37
  text "DIO" at 770.98,100.98 h39.37
  text "G" at 910.98,100.98 h39.37
  text "CLK" at 975.98,100.98 h39.37
  text "V" at 1120.98,100.98 h39.37
  text "rev 1.2" at 305.98,95.98 h39.37
Board Shape:
  the board outline again, w0